# EAGLE board CT_schematic (EAGLE 7.6.0)

Size 100 x 80 mm. Coordinates in mm from the lower left corner, seen from the top.
Outline: 0,0 100,0 100,80 0,80 0,0
Copper layers (1*16): Top 0.035mm / dielectric 1.5mm / Bottom 0.035mm
Design rules "default": minimum track width 10mil, minimum drill 24mil, track to track 8mil, track to pad 8mil, pad to pad 8mil, via to via 8mil, smd to smd 8mil, copper to edge 40mil, drill to drill 8mil, minimum pad ring 10mil, minimum via ring 8mil, stop-mask expansion 4mil, vias tented up to drill 0mil, thermal gap 10mil

## Footprints (pad centres in the part's own frame; a part is rotated, then mirrored left to right if it is on the bottom)
C0603 = smd 0.8 x 0.8: 1 -0.762,0; 2 0.762,0
C0402 = smd 0.5 x 0.5: 1 -0.508,0; 2 0.508,0
C1210 = smd 1.2 x 2.5: 1 -1.524,0; 2 1.524,0
C0805 = smd 1.2 x 1.3: 1 -1.016,0; 2 1.016,0
R0603 = smd 0.8 x 0.8: 1 -0.762,0; 2 0.762,0
EXV-9H = smd 3.505 x 1.676: 1 -2.857,0; 2 2.857,0
L0603 = smd 0.8 x 0.8: 1 -0.762,0; 2 0.762,0
PJ-037B_PACKAGE = drill 3.7 square: 1 12,0 | drill 3.2 square: 2 6,0
UFBGA176_25 = smd 0.3 x 0.3: A1 -4.55,4.55; A2 -3.9,4.55; A3 -3.25,4.55; A4 -2.6,4.55; A5 -1.95,4.55; A6 -1.3,4.55; A7 -0.65,4.55; A8 0,4.55; A9 0.65,4.55; A10 1.3,4.55; A11 1.95,4.55; A12 2.6,4.55; A13 3.25,4.55; A14 3.9,4.55; A15 4.55,4.55; B1 -4.55,3.9; B2 -3.9,3.9; B3 -3.25,3.9; B4 -2.6,3.9; B5 -1.95,3.9; B6 -1.3,3.9; B7 -0.65,3.9; B8 0,3.9; B9 0.65,3.9; B10 1.3,3.9; B11 1.95,3.9; B12 2.6,3.9; B13 3.25,3.9; B14 3.9,3.9; B15 4.55,3.9; C1 -4.55,3.25; C2 -3.9,3.25; C3 -3.25,3.25; C4 -2.6,3.25; C5 -1.95,3.25; C6 -1.3,3.25; C7 -0.65,3.25; C8 0,3.25; C9 0.65,3.25; C10 1.3,3.25; C11 1.95,3.25; C12 2.6,3.25; C13 3.25,3.25; C14 3.9,3.25; C15 4.55,3.25; D1 -4.55,2.6; D2 -3.9,2.6; D3 -3.25,2.6; D4 -2.6,2.6; D5 -1.95,2.6; D6 -1.3,2.6; D7 -0.65,2.6; D8 0,2.6; D9 0.65,2.6; D10 1.3,2.6; D11 1.95,2.6; D12 2.6,2.6; D13 3.25,2.6; D14 3.9,2.6; D15 4.55,2.6; E1 -4.55,1.95; E2 -3.9,1.95; E3 -3.25,1.95; E4 -2.6,1.95; E12 2.6,1.95; E13 3.25,1.95; E14 3.9,1.95; E15 4.55,1.95; F1 -4.55,1.3; F2 -3.9,1.3; F3 -3.25,1.3; F4 -2.6,1.3; F6 -1.3,1.3; F7 -0.65,1.3; F8 0,1.3; F9 0.65,1.3; F10 1.3,1.3; F12 2.6,1.3; F13 3.25,1.3; F14 3.9,1.3; F15 4.55,1.3; G1 -4.55,0.65; G2 -3.9,0.65; G3 -3.25,0.65; G4 -2.6,0.65; G6 -1.3,0.65; G7 -0.65,0.65; G8 0,0.65; G9 0.65,0.65; G10 1.3,0.65; G12 2.6,0.65; G13 3.25,0.65; G14 3.9,0.65; G15 4.55,0.65; H1 -4.55,0; H2 -3.9,0; H3 -3.25,0; H4 -2.6,0; H6 -1.3,0; H7 -0.65,0; H8 0,0; H9 0.65,0; H10 1.3,0; H12 2.6,0; H13 3.25,0; H14 3.9,0; H15 4.55,0; J1 -4.55,-0.65; J2 -3.9,-0.65; J3 -3.25,-0.65; J4 -2.6,-0.65; J6 -1.3,-0.65; J7 -0.65,-0.65; J8 0,-0.65; J9 0.65,-0.65; J10 1.3,-0.65; J12 2.6,-0.65; J13 3.25,-0.65; J14 3.9,-0.65; J15 4.55,-0.65; K1 -4.55,-1.3; K2 -3.9,-1.3; K3 -3.25,-1.3; K4 -2.6,-1.3; K6 -1.3,-1.3; K7 -0.65,-1.3; K8 0,-1.3; K9 0.65,-1.3; K10 1.3,-1.3; K12 2.6,-1.3; K13 3.25,-1.3; K14 3.9,-1.3; K15 4.55,-1.3; L1 -4.55,-1.95; L2 -3.9,-1.95; L3 -3.25,-1.95; L4 -2.6,-1.95; L12 2.6,-1.95; L13 3.25,-1.95; L14 3.9,-1.95; L15 4.55,-1.95; M1 -4.55,-2.6; M2 -3.9,-2.6; M3 -3.25,-2.6; M4 -2.6,-2.6; M5 -1.95,-2.6; M6 -1.3,-2.6; M7 -0.65,-2.6; M8 0,-2.6; M9 0.65,-2.6; M10 1.3,-2.6; M11 1.95,-2.6; M12 2.6,-2.6; M13 3.25,-2.6; M14 3.9,-2.6; M15 4.55,-2.6; N1 -4.55,-3.25; N2 -3.9,-3.25; N3 -3.25,-3.25; N4 -2.6,-3.25; N5 -1.95,-3.25; N6 -1.3,-3.25; N7 -0.65,-3.25; N8 0,-3.25; N9 0.65,-3.25; N10 1.3,-3.25; N11 1.95,-3.25; N12 2.6,-3.25; N13 3.25,-3.25; N14 3.9,-3.25; N15 4.55,-3.25; P1 -4.55,-3.9; P2 -3.9,-3.9; P3 -3.25,-3.9; P4 -2.6,-3.9; P5 -1.95,-3.9; P6 -1.3,-3.9; P7 -0.65,-3.9; P8 0,-3.9; P9 0.65,-3.9; P10 1.3,-3.9; P11 1.95,-3.9; P12 2.6,-3.9; P13 3.25,-3.9; P14 3.9,-3.9; P15 4.55,-3.9; R1 -4.55,-4.55; R2 -3.9,-4.55; R3 -3.25,-4.55; R4 -2.6,-4.55; R5 -1.95,-4.55; R6 -1.3,-4.55; R7 -0.65,-4.55; R8 0,-4.55; R9 0.65,-4.55; R10 1.3,-4.55; R11 1.95,-4.55; R12 2.6,-4.55; R13 3.25,-4.55; R14 3.9,-4.55; R15 4.55,-4.55
SOT-23-6 = smd 1.1 x 0.6: 1 -1.4,0.95; 2 -1.4,0; 3 -1.4,-0.95; 4 1.4,-0.95; 5 1.4,0; 6 1.4,0.95
S29VS256RABBHW000 = smd 0.3 x 0.3: A1 -6,3; A14 0.5,3; C3 -5,2; C4 -4.5,2; C5 -4,2; C6 -3.5,2; C7 -3,2; C8 -2.5,2; C9 -2,2; C10 -1.5,2; C11 -1,2; C12 -0.5,2; D3 -5,1.5; D4 -4.5,1.5; D5 -4,1.5; D6 -3.5,1.5; D7 -3,1.5; D8 -2.5,1.5; D9 -2,1.5; D10 -1.5,1.5; D11 -1,1.5; D12 -0.5,1.5; E3 -5,1; E4 -4.5,1; E5 -4,1; E6 -3.5,1; E7 -3,1; E8 -2.5,1; E9 -2,1; E10 -1.5,1; E11 -1,1; E12 -0.5,1; F3 -5,0.5; F4 -4.5,0.5; F5 -4,0.5; F6 -3.5,0.5; F7 -3,0.5; F8 -2.5,0.5; F9 -2,0.5; F10 -1.5,0.5; F11 -1,0.5; F12 -0.5,0.5; H1 -6,-0.5; H14 0.5,-0.5
MICRO_USB_AB = smd 0.4 x 1.35: 1 1.3,0.26; 2 0.65,0.26; 3 0,0.26; 4 -0.65,0.26; 5 -1.3,0.26 | drill 0.6 pad 0.95 long: 6 4.175,-2.54; 7 -4.175,-2.54 | drill 0.7 pad 1.1 long: 8 -2.225,0.46; 9 2.225,0.46
SOT143B = smd 1 x 0.7: 1 -0.75,-1 | smd 0.6 x 0.7: 2 0.95,-1; 3 0.95,1; 4 -0.95,1
ABLS-25.000MHZ-B2F-T = smd 5.6 x 2.8: 1 -3.81,0; 2 5.69,0
ASEK = smd 1.4 x 1: 1 -1.1,-0.8; 2 1.1,-0.8; 3 1.1,0.8; 4 -1.1,0.8
WSON-8 = smd 0.3 x 0.6: 1 -0.75,0; 2 0.05,0; 3 0.85,0; 4 1.65,0; 5 1.65,3.8; 6 0.85,3.8; 7 0.05,3.8; 8 -0.75,3.8 | smd 3 x 2.6: PAD 0.45,1.9
SON-6 = smd 0.55 x 0.3: 1 -0.355,0.5 | smd 0.52 x 0.3: 2 -0.37,0; 3 -0.37,-0.5; 4 0.37,-0.5; 5 0.37,0; 6 0.37,0.5
SW_4-1437565-2 = smd 1.4 x 2.1: 1 -2.23,4.55; 2 -2.23,-4.55; 3 2.23,4.55; 4 2.23,-4.55
LGM67K-G1J2-24-Z = smd 0.8 x 1.4: A -2,0; C 0,0
NC7SZ125M5X = smd 1.3 x 0.7: 1 -1.3,0.95; 2 -1.3,0; 3 -1.3,-0.95; 4 1.3,-0.95; 5 1.3,0.95
DUMMY_PACKAGE_185 = drill 0.3: 1 0,-1; 2 1.5,-1; 3 3,-1

## Placement (x,y rotation side)
C1  1e-06  [C0603]  -63.5,57.15 0 top  (outside the outline)
C2  1e-07  [C0603]  -67.31,57.15 0 top  (outside the outline)
C3  1e-07  [C0603]  -71.12,57.15 0 top  (outside the outline)
C4  1e-07  [C0603]  -15.24,62.23 0 top  (outside the outline)
C5  1e-07  [C0603]  -19.05,62.23 0 top  (outside the outline)
C6  1e-07  [C0603]  -22.86,62.23 0 top  (outside the outline)
C7  1e-07  [C0603]  -26.67,62.23 0 top  (outside the outline)
C8  1e-07  [C0603]  -30.48,62.23 0 top  (outside the outline)
C9  1e-07  [C0603]  -34.29,62.23 0 top  (outside the outline)
C10  1e-07  [C0603]  -38.1,62.23 0 top  (outside the outline)
C11  1e-07  [C0603]  -41.91,62.23 0 top  (outside the outline)
C12  1e-07  [C0603]  -45.72,62.23 0 top  (outside the outline)
C13  1e-07  [C0603]  -49.53,62.23 0 top  (outside the outline)
C14  1e-07  [C0603]  -53.34,62.23 0 top  (outside the outline)
C15  1e-07  [C0603]  -57.15,62.23 0 top  (outside the outline)
C16  1e-07  [C0603]  -60.96,62.23 0 top  (outside the outline)
C17  4.7e-06  [C0603]  -44.45,57.15 0 top  (outside the outline)
C18  1e-08  [C0603]  -64.77,62.23 0 top  (outside the outline)
C19  1e-06  [C0603]  -68.58,62.23 0 top  (outside the outline)
C20  2.2e-06  [C0603]  -48.26,57.15 0 top  (outside the outline)
C21  2.2e-06  [C0603]  -52.07,57.15 0 top  (outside the outline)
C22  1e-11  [C0402]  -49.53,67.31 0 top  (outside the outline)
C23  1e-11  [C0402]  -53.34,67.31 0 top  (outside the outline)
C24  1e-07  [C0402]  -57.15,67.31 0 top  (outside the outline)
C25  2.2e-06  [C0603]  -55.88,57.15 0 top  (outside the outline)
C26  1e-07  [C0402]  -60.96,67.31 0 top  (outside the outline)
C27  2.2e-06  [C0603]  -59.69,57.15 0 top  (outside the outline)
C28  1e-08  [C0402]  -64.77,67.31 0 top  (outside the outline)
C29  1e-08  [C0402]  -68.58,67.31 0 top  (outside the outline)
C30  1e-05  [C1210]  -71.12,39.37 0 top  (outside the outline)
C31  1e-05  [C0805]  -52.07,45.72 0 top  (outside the outline)
C32  8e-07  [R0603]  -15.24,67.31 0 top  (outside the outline)
C33  1e-05  [C1210]  -16.51,46.99 0 top  (outside the outline)
C34  1e-08  [C0402]  -72.39,67.31 0 top  (outside the outline)
C35  1e-05  [C1210]  -22.86,46.99 0 top  (outside the outline)
C36  1e-05  [C1210]  -29.21,46.99 0 top  (outside the outline)
C37  1e-07  [C0402]  -15.24,72.39 0 top  (outside the outline)
C38  0.0001  [EXV-9H]  -17.78,39.37 0 top  (outside the outline)
C39  0.0001  [EXV-9H]  -29.21,39.37 0 top  (outside the outline)
C40  1e-08  [C0402]  -19.05,72.39 0 top  (outside the outline)
C41  1e-08  [C0402]  -22.86,72.39 0 top  (outside the outline)
F1  240.0  [L0603]  -19.05,67.31 0 top  (outside the outline)
J1  PJ-037B  [PJ-037B_PACKAGE]  -41.91,7.62 0 top  (outside the outline)
R2  1000.0  [R0603]  -22.86,67.31 0 top  (outside the outline)
R7  4700.0  [R0603]  -26.67,67.31 0 top  (outside the outline)
R8  4700.0  [R0603]  -30.48,67.31 0 top  (outside the outline)
R9  47000.0  [R0603]  -35.56,52.07 0 top  (outside the outline)
R10  10000.0  [R0603]  -40.64,52.07 0 top  (outside the outline)
R11  10000.0  [R0603]  -45.72,52.07 0 top  (outside the outline)
R12  10000.0  [R0603]  -50.8,52.07 0 top  (outside the outline)
R13  10000.0  [R0603]  -55.88,52.07 0 top  (outside the outline)
R14  10000.0  [R0603]  -60.96,52.07 0 top  (outside the outline)
R15  10000.0  [R0603]  -66.04,52.07 0 top  (outside the outline)
R16  10000.0  [R0603]  -71.12,52.07 0 top  (outside the outline)
R17  10000.0  [R0603]  -15.24,57.15 0 top  (outside the outline)
R18  10000.0  [R0603]  -20.32,57.15 0 top  (outside the outline)
R19  10000.0  [R0603]  -25.4,57.15 0 top  (outside the outline)
R20  100000.0  [R0603]  -62.23,45.72 0 top  (outside the outline)
R21  806.0  [R0603]  -34.29,67.31 0 top  (outside the outline)
R22  1000.0  [R0603]  -38.1,67.31 0 top  (outside the outline)
R23  100000.0  [R0603]  -67.31,45.72 0 top  (outside the outline)
R24  153694.38  [R0603]  -57.15,45.72 0 top  (outside the outline)
R25  100000.0  [R0603]  -15.24,52.07 0 top  (outside the outline)
R26  100000.0  [R0603]  -20.32,52.07 0 top  (outside the outline)
R27  3900.0  [R0603]  -41.91,67.31 0 top  (outside the outline)
R28  1000.0  [R0603]  -45.72,67.31 0 top  (outside the outline)
R29  10000.0  [R0603]  -30.48,57.15 0 top  (outside the outline)
R30  10000.0  [R0603]  -35.56,57.15 0 top  (outside the outline)
R31  82000.0  [R0603]  -40.64,57.15 0 top  (outside the outline)
R32  300000.0  [R0603]  -25.4,52.07 0 top  (outside the outline)
R33  120000.0  [R0603]  -30.48,52.07 0 top  (outside the outline)
U1  STM32F437IIH6  [UFBGA176_25]  -19.05,6.35 0 top  (outside the outline)
U2  MAX4995AAUT+T  [SOT-23-6]  -34.29,45.72 0 top  (outside the outline)
U3  S29VS256RABBHW000  [S29VS256RABBHW000]  -44.45,29.21 0 top  (outside the outline)
U4  47590-0001  [MICRO_USB_AB]  -50.8,7.62 0 top  (outside the outline)
U5  prtr5v0u2ax  [SOT143B]  -35.56,72.39 0 top  (outside the outline)
U6  ABLS-25.000MHZ-B2F-T  [ABLS-25.000MHZ-B2F-T]  -48.26,39.37 0 top  (outside the outline)
U7  ASEK-32.768KHz-ECST  [ASEK]  -68.58,30.48 0 top  (outside the outline)
U8  LP3878SDX-ADJ/NOPB  [WSON-8]  -49.53,17.78 0 top  (outside the outline)
U9  LP2951ACSDX/NOPB  [WSON-8]  -29.21,29.21 0 top  (outside the outline)
U10  LP3878SDX-ADJ/NOPB  [WSON-8]  -69.85,17.78 0 top  (outside the outline)
U11  TPS3895ADRYR  [SON-6]  -44.45,71.12 0 top  (outside the outline)
U12  4-1437565-2  [SW_4-1437565-2]  -27.94,20.32 0 top  (outside the outline)
U13  Q65110A2395  [LGM67K-G1J2-24-Z]  -59.69,39.37 0 top  (outside the outline)
U14  nc7sz125m5x  [NC7SZ125M5X]  -39.37,45.72 0 top  (outside the outline)
U15  nc7sz125m5x  [NC7SZ125M5X]  -45.72,45.72 0 top  (outside the outline)
U16  Dummy  [DUMMY_PACKAGE_185]  -41.91,72.39 0 top  (outside the outline)

## Library data of the parts
C1-C41 F1 J1 R2 R7-R33 U1-U16 = circuit_tree

## Nets
CLK_CRYSTAL_U1_G1: C22.1 U1.G1 U6.1
CLK_CRYSTAL_U1_H1: C23.1 U1.H1 U6.2
CLK_U1_E1: U1.E1 U7.3
GND: C1.2 C2.2 C3.2 C4.2 C5.2 C6.2 C7.2 C8.2 C9.2 C10.2 C11.2 C12.2 C13.2 C14.2 C15.2 C16.2 C17.2 C18.2 C19.2 C20.2 C21.2 C22.2 C23.2 C24.2 C25.2 C26.2 C27.2 C28.2 C29.2 C30.2 C31.2 C32.2 C33.2 C34.2 C35.2 C36.2 C37.2 C38.2 C39.2 C40.2 C41.2 J1.2 R2.2 R9.2 R13.2 R15.2 R22.2 R25.2 R28.2 R31.2 R33.2 U1.D5 U1.D7 U1.D8 U1.D9 U1.F2 U1.F6 U1.F7 U1.F8 U1.F9 U1.F10 U1.F12 U1.G2 U1.G6 U1.G7 U1.G8 U1.G9 U1.G10 U1.G12 U1.H6 U1.H7 U1.H8 U1.H9 U1.H10 U1.H12 U1.J6 U1.J7 U1.J8 U1.J9 U1.J10 U1.K6 U1.K7 U1.K8 U1.K9 U1.K10 U1.M1 U1.M8 U1.M9 U1.N1 U2.2 U3.C5 U3.D12 U3.E3 U3.F5 U4.5 U4.6 U4.7 U4.8 U4.9 U5.1 U7.2 U8.3 U8.PAD U9.3 U9.4 U9.PAD U10.3 U10.PAD U11.2 U13.C U14.1 U14.3 U15.1 U15.3 U16.1
NET_U1_C6: R10.1 U1.C6
NET_U1_D6: R11.1 U1.D6
NET_U1_F13: C21.1 U1.F13
NET_U1_J1: R8.1 U1.J1 U15.4
NET_U1_L4: R13.1 U1.L4
NET_U1_M6: R12.1 U1.M6
NET_U1_M10: C20.1 U1.M10
NET_U1_R1: C18.1 C19.1 F1.1 U1.P1 U1.R1
NET_U1_R14: U13.A
NET_U1_R15: U12.3 U12.4
NET_U2_3: R9.1 U2.3
NET_U3_C9: U3.C9
NET_U3_D8: R7.1 U3.D8 U14.4
NET_U8_1: C29.1 U8.1
NET_U8_6: R21.2 R22.1 U8.6
NET_U8_8: R20.1 U8.8
NET_U9_5: R23.1 U9.5
NET_U9_7: R24.2 R25.1 U9.7
NET_U10_1: C34.1 U10.1
NET_U10_6: R27.2 R28.1 U10.6
NET_U10_8: R26.1 U10.8
NET_U11_1: R30.1 R31.1 U11.1
NET_U11_3: R32.2 R33.1 U11.3
NET_U11_4: R29.1 U11.4 U14.2 U15.2
NET_U12_1: R2.1 U12.1 U12.2
PROC_ADC1_IN3: U1.R2 U16.2
PROC_ADC1_IN4: U1.N4 U16.3
PROC_FMC_A16: U1.N14 U3.D4
PROC_FMC_A17: U1.N13 U3.C11
PROC_FMC_A18: U1.M15 U3.D10
PROC_FMC_A19: U1.A1 U3.C10
PROC_FMC_A20: U1.B1 U3.D5
PROC_FMC_A21: U1.B2 U3.C4
PROC_FMC_A22: U1.B3 U3.C12
PROC_FMC_A23: U1.A2 U3.D7
PROC_FMC_CLK: U1.D11 U3.C6
PROC_FMC_D0: U1.M14 U3.F3
PROC_FMC_D1: U1.L14 U3.F4
PROC_FMC_D2: U1.B12 U3.E6
PROC_FMC_D3: U1.C12 U3.E7
PROC_FMC_D4: U1.R8 U3.F8
PROC_FMC_D5: U1.P8 U3.F9
PROC_FMC_D6: U1.P9 U3.E10
PROC_FMC_D7: U1.R9 U3.E11
PROC_FMC_D8: U1.P10 U3.E4
PROC_FMC_D9: U1.R10 U3.E5
PROC_FMC_D10: U1.N11 U3.F6
PROC_FMC_D11: U1.P11 U3.F7
PROC_FMC_D12: U1.R11 U3.E8
PROC_FMC_D13: U1.P15 U3.E9
PROC_FMC_D14: U1.P14 U3.F11
PROC_FMC_D15: U1.N15 U3.F12
PROC_FMC_NE2: R17.1 U1.C10 U3.D11
PROC_FMC_NL: U1.B5 U3.D6
PROC_FMC_NOE: R19.1 U1.D10 U3.E12
PROC_FMC_NWAIT: R16.1 U1.B11 U3.C3
PROC_FMC_NWE: R18.1 U1.C11 U3.C8
PROC_GPIO_TO_U1_USB_FAULT: R14.1 U1.A4 U2.6
PROC_GPIO_TO_U1_VBUS_EN: R15.1 U1.A3 U2.4
PROC_USB_OTG_FS_DM: U1.C15 U4.2 U5.3
PROC_USB_OTG_FS_DP: U1.B15 U4.3 U5.2
PROC_USB_OTG_FS_ID: U1.D15 U4.4
PROC_USB_OTG_FS_VBUS: U1.E15 U2.1 U4.1 U5.4
VCC_S1_12V3: C30.1 C32.1 C35.1 C38.1 C39.1 J1.1 R20.2 R26.2 U8.4 U9.8 U10.4
VCC_TIER1_1V8: C1.1 C2.1 C3.1 C4.1 C5.1 C6.1 C7.1 C8.1 C9.1 C10.1 C11.1 C12.1 C13.1 C14.1 C15.1 C16.1 C17.1 C24.1 C25.1 C26.1 C27.1 C31.1 C37.1 C40.1 C41.1 F1.2 R7.2 R8.2 R10.2 R11.2 R12.2 R14.2 R16.2 R17.2 R18.2 R19.2 R21.1 R29.2 R30.2 R32.1 U1.C1 U1.C5 U1.C7 U1.C8 U1.C9 U1.F3 U1.G3 U1.G13 U1.H13 U1.J12 U1.J13 U1.K4 U1.N8 U1.N9 U1.N10 U3.C7 U3.D3 U3.F10 U8.5 U11.6 U14.5 U15.5
VCC_TIER1_3V3: C28.1 C33.1 R23.2 R24.1 U7.4 U9.1
VCC_TIER1_5V0: C36.1 R27.1 U2.5 U10.5

## Tracks (layer width: path | path; a pad name or v marks a point on that pad's centre or on a via)
CLK_CRYSTAL_U1_G1  (2 unrouted)
CLK_CRYSTAL_U1_H1  (2 unrouted)
CLK_U1_E1  (1 unrouted)
GND  (114 unrouted)
NET_U1_C6  (1 unrouted)
NET_U1_D6  (1 unrouted)
NET_U1_F13  (1 unrouted)
NET_U1_J1  (2 unrouted)
NET_U1_L4  (1 unrouted)
NET_U1_M6  (1 unrouted)
NET_U1_M10  (1 unrouted)
NET_U1_R1  (4 unrouted)
NET_U1_R15  (1 unrouted)
NET_U2_3  (1 unrouted)
NET_U3_D8  (2 unrouted)
NET_U8_1  (1 unrouted)
NET_U8_6  (2 unrouted)
NET_U8_8  (1 unrouted)
NET_U9_5  (1 unrouted)
NET_U9_7  (2 unrouted)
NET_U10_1  (1 unrouted)
NET_U10_6  (2 unrouted)
NET_U10_8  (1 unrouted)
NET_U11_1  (2 unrouted)
NET_U11_3  (2 unrouted)
NET_U11_4  (3 unrouted)
NET_U12_1  (2 unrouted)
PROC_ADC1_IN3  (1 unrouted)
PROC_ADC1_IN4  (1 unrouted)
PROC_FMC_A16  (1 unrouted)
PROC_FMC_A17  (1 unrouted)
PROC_FMC_A18  (1 unrouted)
PROC_FMC_A19  (1 unrouted)
PROC_FMC_A20  (1 unrouted)
PROC_FMC_A21  (1 unrouted)
PROC_FMC_A22  (1 unrouted)
PROC_FMC_A23  (1 unrouted)
PROC_FMC_CLK  (1 unrouted)
PROC_FMC_D0  (1 unrouted)
PROC_FMC_D1  (1 unrouted)
PROC_FMC_D2  (1 unrouted)
PROC_FMC_D3  (1 unrouted)
PROC_FMC_D4  (1 unrouted)
PROC_FMC_D5  (1 unrouted)
PROC_FMC_D6  (1 unrouted)
PROC_FMC_D7  (1 unrouted)
PROC_FMC_D8  (1 unrouted)
PROC_FMC_D9  (1 unrouted)
PROC_FMC_D10  (1 unrouted)
PROC_FMC_D11  (1 unrouted)
PROC_FMC_D12  (1 unrouted)
PROC_FMC_D13  (1 unrouted)
PROC_FMC_D14  (1 unrouted)
PROC_FMC_D15  (1 unrouted)
PROC_FMC_NE2  (2 unrouted)
PROC_FMC_NL  (1 unrouted)
PROC_FMC_NOE  (2 unrouted)
PROC_FMC_NWAIT  (2 unrouted)
PROC_FMC_NWE  (2 unrouted)
PROC_GPIO_TO_U1_USB_FAULT  (2 unrouted)
PROC_GPIO_TO_U1_VBUS_EN  (2 unrouted)
PROC_USB_OTG_FS_DM  (2 unrouted)
PROC_USB_OTG_FS_DP  (2 unrouted)
PROC_USB_OTG_FS_ID  (1 unrouted)
PROC_USB_OTG_FS_VBUS  (3 unrouted)
VCC_S1_12V3  (10 unrouted)
VCC_TIER1_1V8  (61 unrouted)
VCC_TIER1_3V3  (5 unrouted)
VCC_TIER1_5V0  (3 unrouted)